# Altium PCB IMX6.PcbDoc
Units mil, origin at the board's own origin, x right, y up, seen from the top; angles counter-clockwise.
Board outline 7950 x 5550 mil, 2 copper layers (Top Layer, Bottom Layer), stack 12.8 mil thick; 109 components, 196 nets, 547 pads, 29 vias.
Unrouted connection lines stored in the file: 264.
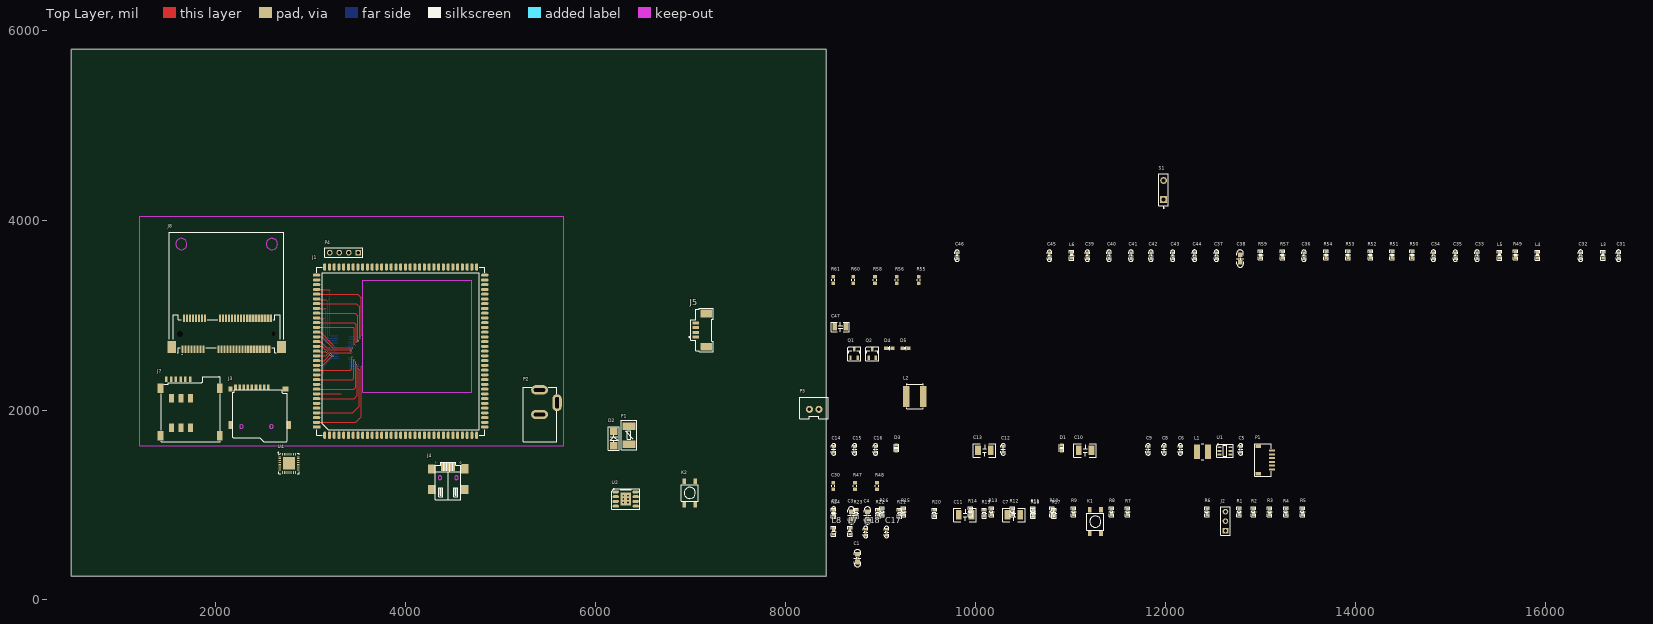
[diagram p0: Top Layer view]
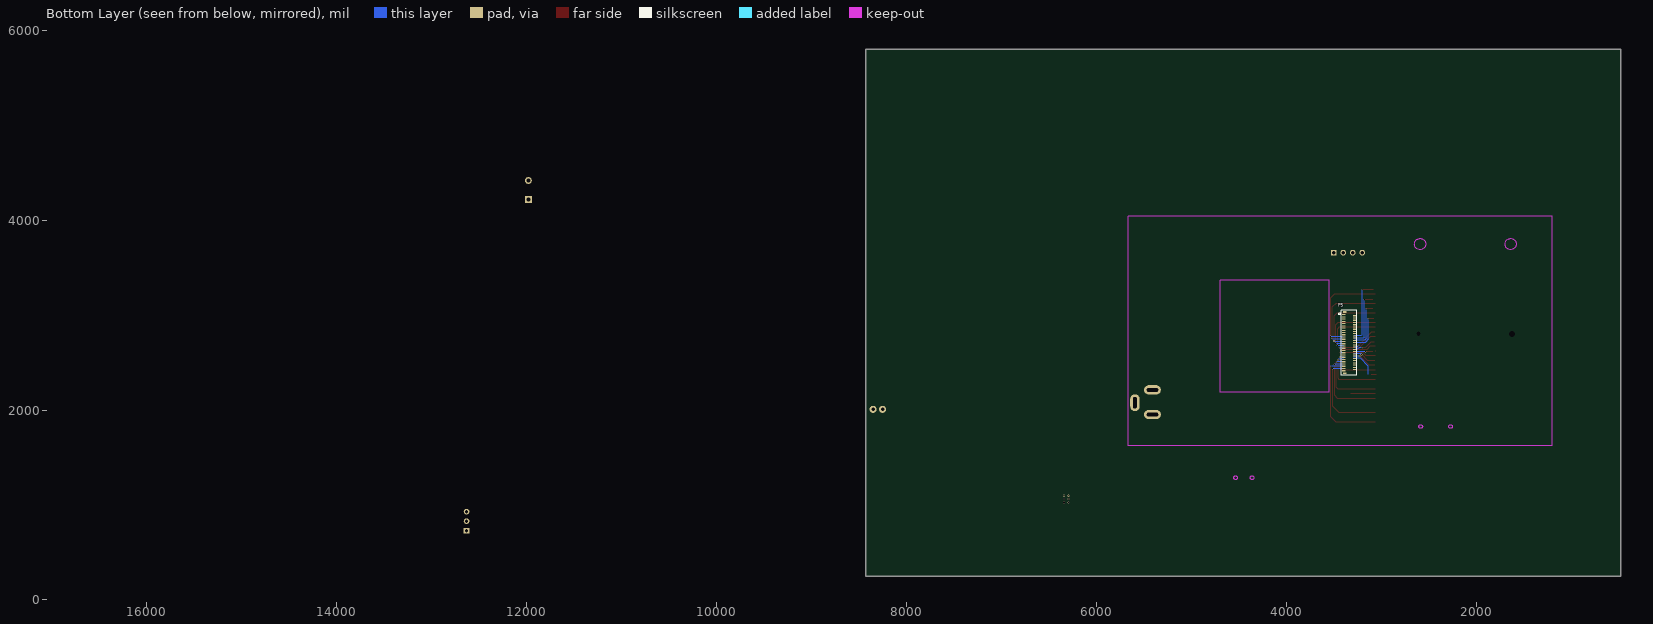
[diagram p1: Bottom Layer view, seen from below]

## Layer stack, top to bottom
Top Layer: signal copper 1.4
Dielectric: core 10, FR-4, Dk 4.2
Bottom Layer: signal copper 1.4

## Board outline
475,5800 8425,5800 8425,250 475,250

## Design rules (kind name [scope] priority, off if disabled: settings)
Clearance [All] p1 off: gap=15
ComponentClearance [All] p1 off: gap=0 collisioncheckmode=3 verticalgap=0
DiffPairsRouting [All] p1: maxlimit=10 minlimit=8 mostfreqgap=8 maxuncoupledlength=500
HoleSize [All] p1: absolutevalues=TRUE maxlimit=300 minlimit=1 maxpercent=80.000 minpercent=20.000
PlaneConnect [All] p1: planeconnectstyle=Direct reliefexpansion=20 reliefentries=4 reliefconductorwidth=12 reliefairgap=10
PolygonConnect [All] p1: connectstyle=Direct reliefconductorwidth=15 reliefentries=4 polygonreliefangle="90 Angle"
RoutingVias [All] p1: holewidth=12 width=20 viastyle="Through Hole" minholewidth=8 minwidth=16 maxholewidth=200 maxwidth=300
SolderMaskExpansion [All] p1: expansion=4
TestPointUsage FabricationTestPointUsage [All] p1: valid=0 allowmultiple=FALSE
Testpoint FabricationTestpoint [(IsPad And (OnTopLayer Or OnBottomLayer))] p1: side=3 testpointundercomponent=TRUE minsize=40 maxsize=100 preferedsize=60 minholesize=0 maxholesize=40 preferedholesize=32 testpointgrid=1 style=297 order=0123456789
Width [All] p1: maxlimit=200 minlimit=6 preferedwidth=10 minimp=50.000000 maximp=50.000000 favimp=50.000000
15 further rules are at their usual default settings.

## Classes and differential pairs
component class 9.RGB&TOUCH: C17 C18 C31 C32 C33 C34 C35 C36 C37 C38 C39 C40 C41 C42 C43 C44 C45 C46 C47 J5 J7 J8 L3 L4 L5 L6 L7 L8 P5 R49 R50 R51 R52 R53 R54 R55 R56 R57 R58 R59 R60 R61 U4
component class 0.CONNECTOR: C1 C2 C3 C4 J1 J2 J3 J4 K1 K2 R1 R2 R3 R4 R5 R6 R7 R8 R9 R10 R11 R12 R13 R14 R15 R16
component class 1.POWER: C5 C6 C7 C8 C9 C10 C11 C12 C13 C14 C15 C16 D1 D2 D3 F1 L1 L2 P1 P2 P3 R17 R18 R19 R20 R21 R22 R23 R24 S1 U1 U2
component class 2.ETH: C30 D4 D5 P4 Q1 Q2 R47 R48
differential pair USB_OTG: +USB_OTG_P -USB_OTG_N

## Components (designator, comment, footprint, x,y, rotation, side; value= is the part's Value field where it differs from the comment)
C1 "22uF" 0805C 8755,440 r0 top
C2 "0.1uF" 0603C 8505,920 r0 top
C3 "22uF" 0805C 8690,890 r0 top
C4 "22uF" 0805C 8860,890 r0 top
C5 "0.1uF" 0603C 12790,1585 r0 top
C6 "0.1uF" 0603C 12155,1585 r0 top
C7 "220uF" 1210C 10470,895 r0 top
C8 "10uF" 0603C 11985,1585 r0 top
C9 "0.1uF" 0603C 11815,1585 r0 top
C10 "220uF" 1210C 11220,1575 r0 top
C11 "220uF" 1210C 9955,895 r0 top
C12 "Cap" 0603C 10290,1585 r0 top
C13 "220uF" 1210C 10160,1575 r0 top
C14 "Cap" 0603C 8505,1585 r0 top
C15 "Cap" 0603C 8725,1585 r0 top
C16 "Cap" 0603C 8945,1585 r0 top
C17 "470pF" 0603C 9061,715 r0 top
C18 "470pF" 0603C 8841,715 r0 top
C30 "104" 0603 8500,1200 r90 top
C31 "0.1uF" 0603C 16770,3625 r0 top
C32 "0.1uF" 0603C 16370,3625 r0 top
C33 "0.1uF" 0603C 15280,3625 r0 top
C34 "470pF" 0603C 14820,3625 r0 top
C35 "470pF" 0603C 15050,3625 r0 top
C36 "0.1uF" 0603C 13455,3625 r0 top
C37 "0.1uF" 0603C 12535,3625 r0 top
C38 "10uF" 0805C 12785,3595 r0 top
C39 "1uF" 0603C 11175,3625 r0 top
C40 "1uF" 0603C 11405,3625 r0 top
C41 "1uF" 0603C 11635,3625 r0 top
C42 "1uF" 0603C 11845,3625 r0 top
C43 "1uF" 0603C 12075,3625 r0 top
C44 "1uF" 0603C 12305,3625 r0 top
C45 "0.1uF" 0603C 10775,3625 r0 top
C46 "0.1uF" 0603C 9805,3625 r0 top
C47 "47uF" 1206C 8515,2875 r0 top
D1 "发光二极管" 0603D 10905,1600 r0 top
D2 "SS54" SMA 6190,1700 r90 top
D3 "发光二极管" 0603D 9165,1600 r0 top
D4 "WORK" 0603-LED 9090,2650 r0 top
D5 "LINK" 0603-LED 9260,2650 r0 top
F1 "Fuse Thermal" 1812F 6350,1640 r90 top
J1 "QFN132" QFN132 3944.83,2620 r90 top
J2 "DEBUG" HDR1X3 12630,730 r90 top
J3 "TF-CAD" TF-CARD 2494,2168 r90 top
J4 "USB_AB" "MINI USB B" 4444.99,1401 r0 top
J5 "SPEAK" 1.25-4P 7051.76,2872.39 r0 top
J7 "MircoSIM" "Micro SIM" 1533,1814 r0 top
J8 "Mini PCI Express" MINI-PCIE-SHORT 2112.87,2802.58 r0 top
K1 "按键" SS-SPB-4.5 11260,825 r90 top
K2 "按键" SS-SPB-4.5 6989,1127 r90 top
L1 "3.3uH" L4030 12390,1560 r0 top
L2 "Inductor" L-6045 9268.76,2143 r0 top
L3 "电感" 0603L 16605,3630 r0 top
L4 "电感" 0603L 15915,3630 r0 top
L5 "电感" 0603L 15515,3630 r0 top
L6 "电感" 0603L 11010,3630 r0 top
L7 "电感" 0603L 8676,722 r0 top
L8 "电感" 0603L 8506,722 r0 top
P1 "DLP-PW" SH1.0-6P 13120,1375 r90 top
P2 "Change" DC-005 5407,1957 r90 top
P3 "BAT" XH2.54-2P 8249,2007 r0 top
P4 "CSB" HDR1X4 3498,3657 r180 top
P5 "FPC-51PIN" FH26-51S-0.3SHW 3393.03,3004.6 r90 bottom
Q1 "NPN" SOT-23-NPN 8720,2595 r0 top
Q2 "NPN" SOT-23-NPN 8910,2595 r0 top
R1 "10K" 0603R 12775,930 r0 top
R2 "10K" 0603R 12925,930 r0 top
R3 "10K" 0603R 13095,930 r0 top
R4 "10K" 0603R 13265,930 r0 top
R5 "10K" 0603R 13440,930 r0 top
R6 "510R" 0603R 12435,930 r0 top
R7 "22R" 0603R 11600,930 r0 top
R8 "22R" 0603R 11430,930 r0 top
R9 "22R" 0603R 11030,930 r0 top
R10 "22R" 0603R 10805,930 r0 top
R11 "10K" 0603R 10605,930 r0 top
R12 "22R" 0603R 10385,930 r0 top
R13 "22R" 0603R 10165,930 r0 top
R14 "510R" 0603R 9945,930 r0 top
R15 "0R" 0603R 9240,930 r0 top
R16 "0R" 0603R 9015,930 r0 top
R17 "10K" 0603R 10825,915 r0 top
R18 "33K" 0603R 10605,915 r0 top
R19 "10K" 0603R 10090,915 r0 top
R20 "Res1" 0603R 9565,915 r0 top
R21 "1K" 0603R 9200,915 r0 top
R22 "Res Semi" 0603R 8970,915 r0 top
R23 "Res Semi" 0603R 8740,915 r0 top
R24 "Res Semi" 0603R 8505,915 r0 top
R47 "Res1" 0603 8730,1200 r90 top
R48 "Res1" 0603 8960,1200 r90 top
R49 "0R" 0603R 15685,3635 r0 top
R50 "33R" 0603R 14595,3635 r0 top
R51 "33R" 0603R 14385,3635 r0 top
R52 "33R" 0603R 14155,3635 r0 top
R53 "33R" 0603R 13920,3635 r0 top
R54 "33R" 0603R 13690,3635 r0 top
R55 "47R" 0603 9400,3370 r90 top
R56 "47R" 0603 9170,3370 r90 top
R57 "4.7K" 0603R 13230,3635 r0 top
R58 "47R" 0603 8940,3370 r90 top
R59 "4.7K" 0603R 13000,3635 r0 top
R60 "47R" 0603 8710,3370 r90 top
R61 "100K" 0603 8500,3370 r90 top
S1 "SW-PB" SPST-2 11979,4317 r90 top
U1 "TPS562201" SOT23-6-DC 12625,1570 r0 top
U2 "TPS54331" SOP8-POW 6314.42,1062 r0 top
U4 "WM8960" QFN-32 2768.54,1438.16 r0 top

## Footprints (in the part's own frame and the unit in brackets; to place one, negate y for a bottom-side part, rotate by r counter-clockwise, add the part's x,y. Pads: shape width x height; smd on the part's side, far side on the other; paste and mask are expansions set on the pad)
1.25-4P [mil]
  rect 71x32 smd: 1(0,-103.43) 2(0,-54.21) 3(0,-5) 4(0,44.21)
  rect 118x83 smd: 5(110.24,-205.79) 6(110.24,144.61)
  silkscreen extent -68,-261 185,200
0603 [mm]
  rect 1x1 smd: 1(-0.864,0) 2(0.864,0)
  silkscreen extent -0.18,-0.43 0.18,0.43
0603-LED [mm]
  rect 1x1 smd: 1(-0.864,0) 2(0.864,0)
  silkscreen extent -0.18,-0.51 0.18,0.56
0603C [mil]
  rect 31.5x30 smd: 1(0,30) 2(0,-30)
  silkscreen extent -24,-60 24,60
0603D [mil]
  rect 35.43x30 smd: A(0,-30) K(0,30)
  silkscreen extent -24,-40 24,39
0603L [mil]
  rect 31.5x30 smd: 1(-0.91,-29.91) 2(-0.91,30.09)
  silkscreen extent -28,-54 27,54
0603R [mil]
  rect 31.5x30 smd: 1(0,30) 2(0,-30)
  silkscreen extent -28,-53 28,53
0805C [mil]
  rect 50x50 smd: 1(0,40) 2(0,-40)
  silkscreen extent -39,-91 35,91
1206C [mm]
  rect 1.2x2 smd: 1(0,0) 2(3,0)
  silkscreen extent -0.9,-1.3 3.9,1.3
1210C [mil]
  rect 60x100 smd: 1(0,0) 2(-135,0)
  silkscreen extent -185,-70 50,70
1812F [mm]
  rect 2x3.4 smd: 1(0,0) 2(4.85,0)
  silkscreen extent -1.5,-2.03 6.35,2.03
DC-005 [mm]
  oval 2.5x4.5 hole 1 slot 3 at 90 deg: 1(6.477,0) 2(-0.127,0)
  oval 4.5x2.5 hole 1 slot 3 at 0 deg: 3(3.048,-4.699)
  silkscreen extent -7.37,-4.63 7.23,4.37
FH26-51S-0.3SHW [mm]
  rect 0.45x1 smd: 0(-15.7,-0.3) 0(0.7,-0.3)
  rect 0.3x0.95 smd: 1(0,0.05) 2(-0.3,-2.91) 3(-0.6,0.05) 4(-0.9,-2.91) 5(-1.2,0.05) 6(-1.5,-2.91) 7(-1.8,0.05) 8(-2.1,-2.91) 9(-2.4,0.05) 10(-2.7,-2.91) 11(-3,0.05) 12(-3.3,-2.91) 13(-3.6,0.05) 14(-3.9,-2.91) 15(-4.2,0.05) 16(-4.5,-2.91) 17(-4.8,0.05) 18(-5.1,-2.91) 19(-5.4,0.05) 20(-5.7,-2.91) 21(-6,0.05) 22(-6.3,-2.91) 23(-6.6,0.05) 24(-6.9,-2.91) 25(-7.2,0.05) 26(-7.5,-2.91) 27(-7.8,0.05) 28(-8.1,-2.91) 29(-8.4,0.05) 30(-8.7,-2.91) 31(-9,0.05) 32(-9.3,-2.91) 33(-9.6,0.05) 34(-9.9,-2.91) 35(-10.2,0.05) 36(-10.5,-2.91) 37(-10.8,0.05) 38(-11.1,-2.91) 39(-11.4,0.05) 40(-11.7,-2.91) 41(-12,0.05) 42(-12.3,-2.91) 43(-12.6,0.05) 44(-12.9,-2.91) 45(-13.2,0.05) 46(-13.5,-2.91) 47(-13.8,0.05) 48(-14.1,-2.91) 49(-14.4,0.05) 50(-14.7,-2.91) 51(-15,0.05)
  silkscreen extent -16.2,-3.5 1.1,1.38
HDR1X3 [mm] "Connector; Header; 3 Position"
  rect 1.5x1.5 hole 0.9: 1(0,0)
  round 1.5 hole 0.9: 2(2.54,0) 3(5.08,0)
  silkscreen extent -1.27,-1.27 6.35,1.27
HDR1X4 [mm] "Connector; Header; 4 Position"
  rect 1.5x1.5 hole 0.9: 1(0,0)
  round 1.5 hole 0.9: 2(2.54,0) 3(5.08,0) 4(7.62,0)
  silkscreen extent -1.27,-1.27 8.89,1.27
L4030 [mm]
  rect 1.6x3.9 smd: 1(-1.45,0) 2(1.45,0)
  silkscreen extent -0.35,-2.1 0.35,2.1
L-6045 [mm]
  rect 1.7x5.7 smd: 1(0,0) 2(4.5,0)
  silkscreen extent 0,-3.3 4.57,3.3
"Micro SIM" [mm]
  rect 1.55x2.6 smd: 0(-2.95,-2.15) 0(-2.95,10.53) 0(12.85,-2.15) 0(12.85,10.53)
  rect 1.4x2.3 smd: 0(0,0) 0(0,7.92) 0(2.54,0) 0(2.54,7.92) 0(5.08,0) 0(5.08,7.92)
  rect 0.7x1.35 smd: 1(-0.12,12.955) 2(2.42,12.955) 3(4.96,12.955) 5(-1.39,12.955) 6(1.15,12.955) 7(3.69,12.955)
  silkscreen extent -2.82,-3.82 13.05,13.58
"MINI USB B" [mm]
  rect 0.5x2.3 smd: 1(-1.6,0) 2(-0.8,0) 3(0,0) 4(0.8,0) 5(1.6,0)
  rect 2x2.5 smd: 6(4.45,-6.038) 7(4.45,-0.538) 8(-4.45,-0.554) 9(-4.45,-6.038)
  Keep-Out Layer circle w0.1: c-2.2,-2.893 r0.5
  Keep-Out Layer circle w0.1: c2.2,-2.893 r0.5
  silkscreen extent -3.4,-8.74 3.4,1.22, body extent -5.32,-8.77 5.38,0.43, height 3.95
MINI-PCIE-SHORT [mm]
  rect 0.6x2 smd: 1(-11.8,-4.1) 2(-11.4,4.1) 3(-11,-4.1) 4(-10.6,4.1) 5(-10.2,-4.1) 6(-9.8,4.1) 7(-9.4,-4.1) 8(-9,4.1) 9(-8.6,-4.1) 10(-8.2,4.1) 11(-7.8,-4.1) 12(-7.4,4.1) 13(-7,-4.1) 14(-6.6,4.1) 15(-6.2,-4.1) 16(-5.8,4.1) 17(-2.2,-4.1) 18(-1.8,4.1) 19(-1.4,-4.1) 20(-1,4.1) 21(-0.6,-4.1) 22(-0.2,4.1) 23(0.2,-4.1) 24(0.6,4.1) 25(1,-4.1) 26(1.4,4.1) 27(1.8,-4.1) 28(2.2,4.1) 29(2.6,-4.1) 30(3,4.1) 31(3.4,-4.1) 32(3.8,4.1) 33(4.2,-4.1) 34(4.6,4.1) 35(5,-4.1) 36(5.4,4.1) 37(5.8,-4.1) 38(6.2,4.1) 39(6.6,-4.1) 40(7,4.1) 41(7.4,-4.1) 42(7.8,4.1) 43(8.2,-4.1) 44(8.6,4.1) 45(9,-4.1) 46(9.4,4.1) 47(9.8,-4.1) 48(10.2,4.1) 49(10.6,-4.1) 50(11,4.1) 51(11.4,-4.1) 52(11.8,4.1)
  rect 2.3x3.2 smd: 53(-14.65,-3.5) 54(14.65,-3.5)
  rrect70% 0x0 hole 1.6: 55(-12.5,0)
  rrect70% 0x0 hole 1.1: 56(12.5,0)
  Keep-Out Layer circle w0.203: c12.1,24 r1.5
  Keep-Out Layer circle w0.203: c-12.132,24.003 r1.5
  silkscreen extent -15.3,-5.1 15.3,27.2
QFN132 [mm]
  rect 0.82x2 smd: 1(-20.32,22.5)
  oval 0.82x2 smd: 2(-19.05,22.5) 3(-17.78,22.5) 4(-16.51,22.5) 5(-15.24,22.5) 6(-13.97,22.5) 7(-12.7,22.5) 8(-11.43,22.5) 9(-10.16,22.5) 10(-8.89,22.5) 11(-7.62,22.5) 12(-6.35,22.5) 13(-5.08,22.5) 14(-3.81,22.5) 15(-2.54,22.5) 16(-1.27,22.5) 17(0,22.5) 18(1.27,22.5) 19(2.54,22.5) 20(3.81,22.5) 21(5.08,22.5) 22(6.35,22.5) 23(7.62,22.5) 24(8.89,22.5) 25(10.16,22.5) 26(11.43,22.5) 27(12.7,22.5) 28(13.97,22.5) 29(15.24,22.5) 30(16.51,22.5) 31(17.78,22.5) 32(19.05,22.5) 33(20.32,22.5) 67(20.32,-22.5) 68(19.05,-22.5) 69(17.78,-22.5) 70(16.51,-22.5) 71(15.24,-22.5) 72(13.97,-22.5) 73(12.7,-22.5) 74(11.43,-22.5) 75(10.16,-22.5) 76(8.89,-22.5) 77(7.62,-22.5) 78(6.35,-22.5) 79(5.08,-22.5) 80(3.81,-22.5) 81(2.54,-22.5) 82(1.27,-22.5) 83(0,-22.5) 84(-1.27,-22.5) 85(-2.54,-22.5) 86(-3.81,-22.5) 87(-5.08,-22.5) 88(-6.35,-22.5) 89(-7.62,-22.5) 90(-8.89,-22.5) 91(-10.16,-22.5) 92(-11.43,-22.5) 93(-12.7,-22.5) 94(-13.97,-22.5) 95(-15.24,-22.5) 96(-16.51,-22.5) 97(-17.78,-22.5) 98(-19.05,-22.5) 99(-20.32,-22.5)
  oval 2x0.82 smd: 34(22.5,20.32) 35(22.5,19.05) 36(22.5,17.78) 37(22.5,16.51) 38(22.5,15.24) 39(22.5,13.97) 40(22.5,12.7) 41(22.5,11.43) 42(22.5,10.16) 43(22.5,8.89) 44(22.5,7.62) 45(22.5,6.35) 46(22.5,5.08) 47(22.5,3.81) 48(22.5,2.54) 49(22.5,1.27) 50(22.5,0) 51(22.5,-1.27) 52(22.5,-2.54) 53(22.5,-3.81) 54(22.5,-5.08) 55(22.5,-6.35) 56(22.5,-7.62) 57(22.5,-8.89) 58(22.5,-10.16) 59(22.5,-11.43) 60(22.5,-12.7) 61(22.5,-13.97) 62(22.5,-15.24) 63(22.5,-16.51) 64(22.5,-17.78) 65(22.5,-19.05) 66(22.5,-20.32) 100(-22.5,-20.32) 101(-22.5,-19.05) 102(-22.5,-17.78) 103(-22.5,-16.51) 104(-22.5,-15.24) 105(-22.5,-13.97) 106(-22.5,-12.7) 107(-22.5,-11.43) 108(-22.5,-10.16) 109(-22.5,-8.89) 110(-22.5,-7.62) 111(-22.5,-6.35) 112(-22.5,-5.08) 113(-22.5,-3.81) 114(-22.5,-2.54) 115(-22.5,-1.27) 116(-22.5,0) 117(-22.5,1.27) 118(-22.5,2.54) 119(-22.5,3.81) 120(-22.5,5.08) 121(-22.5,6.35) 122(-22.5,7.62) 123(-22.5,8.89) 124(-22.5,10.16) 125(-22.5,11.43) 126(-22.5,12.7) 127(-22.5,13.97) 128(-22.5,15.24) 129(-22.5,16.51) 130(-22.5,17.78) 131(-22.5,19.05) 132(-22.5,20.32)
  silkscreen extent -22.5,-22.5 22.5,22.5
QFN-32 [mm]
  rect 0.7x0.25 smd: 1(-2.45,1.75) 2(-2.45,1.25) 3(-2.45,0.75) 4(-2.45,0.25) 5(-2.45,-0.25) 6(-2.45,-0.75) 7(-2.45,-1.25) 8(-2.45,-1.75) 17(2.45,-1.75) 18(2.45,-1.25) 19(2.45,-0.75) 20(2.45,-0.25) 21(2.45,0.25) 22(2.45,0.75) 23(2.45,1.25) 24(2.45,1.75)
  rect 0.25x0.7 smd: 9(-1.75,-2.45) 10(-1.25,-2.45) 11(-0.75,-2.45) 12(-0.25,-2.45) 13(0.25,-2.45) 14(0.75,-2.45) 15(1.25,-2.45) 16(1.75,-2.45) 25(1.75,2.45) 26(1.25,2.45) 27(0.75,2.45) 28(0.25,2.45) 29(-0.25,2.45) 30(-0.75,2.45) 31(-1.25,2.45) 32(-1.75,2.45)
  rect 3.3x3.3 smd: 33(0,0)
  silkscreen extent -2.95,-2.75 2.75,2.95
SH1.0-6P [mm]
  rect 1x1.5 smd: 0(-1.175,3.63) 0(6.175,3.63)
  rect 0.55x1.55 smd: 1(0,0) 2(1,0) 3(2,0) 4(3,0) 5(4,0) 6(5,0)
  silkscreen extent -1.88,0.25 6.88,4.57
SMA [mm]
  rect 2x2 smd: A(-2,0) K(2,0)
  silkscreen extent -3.2,-1.5 3.2,1.5
SOP8-POW [mm]
  oval 1.7x0.8 smd: 1(-2.675,1.905) 2(-2.675,0.635) 3(-2.675,-0.635) 4(-2.675,-1.905) 5(2.675,-1.905) 6(2.675,-0.635) 7(2.675,0.635) 8(2.675,1.905)
  rect 2.8x3.4 smd: 9(0,0)
  silkscreen extent -3.78,-2.7 3.77,2.82
SOT23-6-DC [mm]
  rect 1.1x0.5 smd: 1(-1.45,0.95) 2(-1.45,0) 3(-1.45,-0.95) 4(1.45,-0.95) 5(1.45,0) 6(1.45,0.95)
  silkscreen extent -2.25,-1.75 2.25,1.88, body extent -0.87,-1.5 0.87,1.5, height 1.1
SOT-23-NPN [mm]
  rect 0.6x1.143 smd: 1(0.95,-1.108) 2(-0.95,-1.108) 3(0,1.108)
  silkscreen extent -1.75,-1.89 1.75,1.87, body extent -1.5,-0.66 1.5,0.74, height 1.1
SPST-2 [mm] "Circuit Breaker; 2 Leads"
  rect 1.85x1.85 hole 1.1: 1(-2.54,0)
  round 1.85 hole 1.1: 2(2.54,0)
  silkscreen extent -4.89,-1.27 4.28,1.27
SS-SPB-4.5 [mm]
  rect 1.5x1 smd: 1(-3.15,1.5) 2(3.15,1.5) 3(3.15,-1.5) 4(-3.15,-1.5)
  silkscreen extent -2.25,-2.25 2.25,2.25
TF-CARD [mm]
  rect 1.6x0.7 smd: 1(1.82,-1.466) 2(1.82,-0.366) 3(1.82,0.734) 4(1.82,1.834) 5(1.82,2.934) 6(1.82,4.034) 7(1.82,5.134) 8(1.82,6.234) 9(1.82,7.334)
  rect 1.4x1 smd: 10(1.32,8.634)
  rect 2.2x1.2 smd: 11(-8.28,8.534) 12(-8.28,-6.966)
  rect 1.4x1.6 smd: 13(1.32,-6.066)
  Keep-Out Layer circle w0.203: c-8.68,5.734 r0.5
  Keep-Out Layer circle w0.203: c-8.68,-2.266 r0.5
  silkscreen extent -12.7,-6.37 1.12,8.13
XH2.54-2P [mm]
  round 1.9 hole 0.95 paste+0: 1(0,0)
  round 1.9 hole 0.95: 2(2.54,0)
  silkscreen extent -2.54,-2.54 5.08,3.3

## Part data
C1 C2 C3 C4 C5 C6 C7 C8 C9 C10 C11 C13 C17 C18 C31 C32 C33 C34 C35 C36 C37 C38 C39 C40 C41 C42 C43 C44 C45 C46 C47: library part 电容, "电容"
C12 C14 C15 C16: "Capacitor"
C30: library part CAP
D2: library part SS24
D4 D5: library part LED2, "Typical RED, GREEN, YELLOW, AMBER GaAs LED"
F1: "Thermal Fuse"
J2: library part "Header 3", "Header, 3-Pin"
J4: "小USB插痤"
J5 P4: library part "Header 4", "Header, 4-Pin"
J8: library part MINIPCIE, "MPC24-52K3311"
L1: library part 功率电感
P1: library part "Header 6", "Header, 6-Pin"
P2 P3: library part "Header 2", "Header, 2-Pin"
Q1 Q2: library part 2N5551, "NPN General Purpose Amplifier"
R1 R2 R3 R4 R5 R6 R7 R8 R9 R10 R11 R12 R13 R14 R15 R16 R17 R18 R19 R21 R49 R50 R51 R52 R53 R54 R57 R59: library part 电阻, "电阻"
R20 R47 R48: "Resistor"
R22 R23 R24: "Semiconductor Resistor"
R55 R56 R58 R60 R61: library part Res1, "Resistor"
S1: "Switch"

## Via types
v1: diameter 18, hole 10, Top Layer to Bottom Layer, 22 vias
v2: diameter 22, hole 18, Top Layer to Bottom Layer, 6 vias
v3: diameter 18, hole 11, Top Layer to Bottom Layer, 1 vias

## Nets (pads, with @x,y where several pads share a name; then routed paths per layer and width w, separated by ;. In a path a pad name is that pad's centre, name@x,y a point inside that pad or via, vN(x,y) a via of type N, cw(c..) or ccw(c..) an arc to the next point about the centre after c; other vN are vias at no path point)
+3.3V: C6.1 C7.1 C30.2 C32.1 C46.1 C47.1 J8.2 J8.24 J8.39 J8.41 J8.52 L1.1 L3.1 P4.4 R18.1 R21.2 R47.1 R48.1 R57.1 R59.1 U4.8 U4.10
+12V: C10.2 C11.2 F1.2 P1.1 P1.2 P1.3 U2.2
AUGND: C1.1 C2.1 C3.1 C4.1 C6.2 C7.2 C8.2 C9.2 C10.1 C11.1 C13.1 C14.2 C16.1 C17.2 C18.2 C30.1 C31.2 C32.2 C33.1 C34.2 C35.2 C36.2 C37.2 C38.2 C39.1 C40.1 C41.1 C42.1 C43.1 C44.1 C45.1 C46.2 C47.2 D1.K D2.A D3.K J1.5 J1.6 J1.31 J1.32 J1.33 J1.36 J1.37 J1.54 J1.87 J1.90 J1.111 J1.113 J1.120 J2.3 J3.6 J3.10 J3.11 J3.12 J3.13 J4.5 J4.6 J4.7 J4.8 J4.9 J7.5 J8.4 J8.9 J8.15 J8.18 J8.21 J8.26 J8.27 J8.29 J8.34 J8.35 J8.37 J8.40 J8.43 J8.50 K1.1 K1.2 K2.1 K2.2 L6.1 L6.2 P1.4 P1.5 P1.6 P2.2 P3.2 P4.1 P5.1 P5.2 P5.8 P5.19 P5.28 P5.37 P5.46 P5.51 Q1.1 Q2.1 R19.1 R23.1 R24.1 R61.1 U1.1 U2.7 U2.9 U4.9 U4.20 U4.24 U4.28 U4.33
  other v2: 6289.42,1027 6339.42,1027 6289.42,1062 6339.42,1062 6289.42,1097 6339.42,1097
CLK1_N: J1.83
CLK1_P: J1.82
CSB_CS: P4.3
CSB_SIG: P4.2
CSI_DATA0: J1.121
CSI_DATA1: J1.122
CSI_DATA2: J1.123
CSI_DATA3: J1.124
CSI_DATA4: J1.125
CSI_DATA5: J1.126
CSI_DATA6: J1.127
CSI_DATA7: J1.128
CSI_HSYNC: J1.129 R59.2 U4.17
CSI_MCLK: J1.132
CSI_PIXCLK: J1.131
CSI_VSYNC: J1.130 R57.2 U4.18
DCDC_3V3: C1.2 J1.112 J3.4 R1.2 R2.2 R3.2 R4.2 R5.2 R11.2
DLP_CTL: R60.1 R61.2
ENET1_CRS_DV: J1.43
ENET1_RXD0: J1.45
ENET1_RXD1: J1.44
ENET1_RXER: J1.38
ENET1_TX_CLK: J1.42
ENET1_TXD0: J1.39
ENET1_TXD1: J1.40
ENET1_TXEN: J1.41
ENET2_CRS_DV: J1.49
ENET2_RXD0: J1.51
ENET2_RXD1: J1.50
ENET2_RXER: J1.52
ENET2_TX_CLK: J1.53
ENET2_TXD0: J1.46
ENET2_TXD1: J1.48
ENET2_TXEN: J1.47
GPIO1_0: J1.71
GPIO1_1: J1.72
GPIO1_2: J1.73
GPIO1_3: J1.74
GPIO1_4: J1.75
GPIO1_5: J1.76
GPIO1_6: J1.77
GPIO1_7: J1.78
GPIO1_8: J1.79
GPIO1_9: J1.80
GPIO5_IO0: J1.100
GPIO5_IO1: J1.101
GPIO5_IO2: J1.102
GPIO5_IO3: J1.103
GPIO5_IO4: J1.104
GPIO5_IO5: J1.105
GPIO5_IO6: J1.106
GPIO5_IO7: J1.107
GPIO5_IO8: J1.108
GPIO5_IO9: J1.109
I2C3_SCL: R56.1
I2C3_SDA: R58.1
LCD_DATA0: J1.7 P5.45 | length 855.5
  Top Layer w6: J1.7 3455,2120 3490,2155 v1@3490,2481
  Bottom Layer w6: P5.45@3407,2484 v1@3491,2484
  other v1: 3491,2482
LCD_DATA1: J1.8 P5.44 | length 258
  Top Layer w6: J1.8 3317,2170
LCD_DATA2: J1.9 P5.43 | length 756.1
  Top Layer w6: J1.9 3449,2220 3471,2242 v1@3471,2510
  Bottom Layer w6: P5.43@3405,2509 v1@3472,2509
  other v1: 3473,2509
LCD_DATA3: J1.10 P5.42
LCD_DATA4: J1.11 P5.41 | length 653.8
  Top Layer w6: J1.11 3439,2320 3453,2334 v1(3453,2530)
  Bottom Layer w6: P5.41@3395,2532 v1@3453,2532
LCD_DATA5: J1.12 P5.40 | length 329
  Top Layer w6: J1.12@3052,2370 3105,2370
  Bottom Layer w6: 3134,2377 3134,2462 3216,2544 P5.40@3291,2544
LCD_DATA6: J1.13 P5.39 | length 536.6
  Top Layer w6: J1.13 3418,2420 3432,2434 v1@3432,2554
  Bottom Layer w6: P5.39@3395,2555 v1(3432,2555) v1@3432,2555.78
LCD_DATA7: J1.14 P5.38 | length 263
  Top Layer w6: J1.14@3064,2471 3127,2471 3226,2570 v1@3228,2570
  Bottom Layer w6: v1@3230,2568 P5.38@3288,2568
  other v1: 3226,2569
LCD_DATA8: J1.15 P5.36 | length 251.1
  Top Layer w6: J1.15@3068,2521 3140,2521 v1@3206,2587
  Bottom Layer w6: v1@3206,2583 3215,2592 P5.36@3288,2592
  other v1: 3206,2584
LCD_DATA9: J1.16 P5.35 | length 418.7
  Top Layer w6: J1.16 3156,2570 3189,2603 v1(3430,2603)
  Bottom Layer w6: P5.35@3396,2603 v1(3430,2603)
LCD_DATA10: J1.17 P5.34 | length 182
  Top Layer w6: J1.17@3058,2621 J1.17@3059.02,2620.98 ; J1.17@3085,2616 v1@3165,2616
  Bottom Layer w6: v1@3166,2614.84 P5.34@3267,2614.84
  other v1: 3164,2615
LCD_DATA11: J1.18 P5.33 | length 396.3
  Top Layer w6: J1.18 3117,2670 3151,2636 3414,2636 v1@3421,2629
  Bottom Layer w6: P5.33@3406,2626.65 3423,2626.65 v1(3423,2627)
LCD_DATA12: J1.19 P5.32 | length 232.9
  Top Layer w6: J1.19@3071,2716 3109,2716 3169,2656 v1(3199,2656)
  Bottom Layer w6: v1(3199,2656) 3232,2656 3249,2639 P5.32@3272,2639
LCD_DATA13: J1.20 P5.31 | length 477
  Top Layer w6: J1.20 3115,2770 3229,2656 3440,2656 v1@3441,2655
  Bottom Layer w6: P5.31@3394,2650 3395,2650.01 3419,2650.27 3433.27,2650.27 v1@3439,2656
  other v1: 3441,2656
LCD_DATA14: J1.21 P5.30 | length 270
  Top Layer w6: J1.21@3068,2817 3101,2817 v1@3234,2684
  Bottom Layer w6: v1@3235,2681 3254,2662 P5.30@3276,2662
  other v1: 3235,2683
LCD_DATA15: J1.22 P5.29 | length 647.2
  Top Layer w6: J1.22 3444,2870 3458,2856 v3@3458,2680
  Bottom Layer w6: P5.29 3396.11,2675 3451,2675 v3@3458,2682
  other v3: 3460,2681
LCD_DATA16: J1.23 P5.27 | length 698.7
  Top Layer w6: J1.23 3455,2920 3477,2898 v1(3477,2702)
  Bottom Layer w6: P5.27@3403,2697.51 3404.49,2699 v1@3478,2699
LCD_DATA17: J1.24 P5.26 | length 432.8
  Top Layer w6: J1.24@3078,2959 v1@3136,2959
  Bottom Layer w6: v1(3134,2960) 3134,2744 3168.68,2709.32 P5.26
LCD_DATA18: J1.25 P5.25 | length 813.6
  Top Layer w6: J1.25 3466,3020 3493,2993 v1@3493,2728
  Bottom Layer w6: P5.25 3490.13,2721.13 v1@3496,2727
  other v1: 3495,2726
LCD_DATA19: J1.26 P5.24 | length 512.5
  Top Layer w6: J1.26@3089,3066 v1@3157,3066
  Bottom Layer w6: v1(3156,3065) 3156,2751 3174.05,2732.95 3254,2732.95 3278.42,2733.98 P5.24@3279,2734
LCD_DATA20: J1.27 P5.23 | length 911.1
  Top Layer w6: J1.27 3478,3120 3512,3086 3512,2754 v1@3514,2752
  Bottom Layer w6: P5.23@3408,2744.76 3509.76,2744.76 v1@3515,2750
  other v1: 3513,2749
LCD_DATA21: J1.28 P5.22 | length 589.4
  Top Layer w6: J1.28@3088,3161 v1@3177,3161
  Bottom Layer w6: 3177,2767 v1@3177,3161 ; 3179,2767 3189.43,2756.57 3254,2756.57 3278.4,2757.86 P5.22@3281,2758
  other v1: 3176,3161
LCD_DATA22: J1.29 P5.21 | length 1021.6
  Top Layer w6: J1.29 3495,3220 3531,3184 v1(3531,2776)
  Bottom Layer w6: P5.21@3394,2768 P5.21@3395.01,2768.02 ; P5.21@3409,2768 3410,2769 3523,2769 v1@3531,2777
LCD_DATA23: J1.30 P5.20 | length 679.7
  Top Layer w6: J1.30@3082,3267 v1@3198,3267
  Bottom Layer w6: v1(3198,3266) 3198,2789 3206.81,2780.19 3254,2780.19 3278.46,2780.02 P5.20@3281,2780
LCD_DE: J1.3 P5.50
LCD_HSYNC: J1.2 P5.47 | length 1148
  Top Layer w6: J1.2 3471,1870 3529,1928 v1@3529,2460
  Bottom Layer w6: P5.47@3406,2462 v1@3528,2462
  other v1: 3529,2461
LCD_PCLK: J1.4 P5.49 | length 983.2
  Top Layer w6: J1.4 3442,1970 3510,2038 v1(3510,2436)
  Bottom Layer w6: P5.49@3404,2437 v1@3510,2437
LCD_VDD_EN: J1.99
LCD_VSYNC: J1.1 P5.48
LINK_LED: Q2.2
NetC5_1: C5.1 L1.2 U1.2
NetC5_2: C5.2 U1.6
NetC12_1: C12.1 D2.K L2.1 U2.8
NetC12_2: C12.2 U2.1
NetC14_1: C14.1 U2.4
NetC15_1: C15.1 R24.2
NetC15_2: C15.2 C16.2 U2.6
NetC17_1: C17.1 J5.3 L7.2
NetC18_1: C18.1 J5.4 L8.2
NetC31_1: C31.1 L3.2 U4.32
NetC33_2: C33.2 R49.2 U4.21 U4.26
NetC34_1: C34.1 J5.1 L4.2
NetC35_1: C35.1 J5.2 L5.2
NetC36_1: C36.1 U4.1
NetC37_1: C37.1 C38.1 U4.27
NetC39_2: C39.2 U4.4
NetC40_2: C40.2 U4.5
NetC41_2: C41.2 U4.3
NetC42_2: C42.2 U4.2
NetC43_2: C43.2 U4.6
NetC44_2: C44.2 U4.7
NetD1_A: D1.A R20.2
NetD3_A: D3.A R21.1
NetD4_1: D4.1 R47.2
NetD4_2: D4.2 Q1.3
NetD5_1: D5.1 R48.2
NetD5_2: D5.2 Q2.3
NetF1_1: F1.1 S1.2
NetJ4_2: J4.2 R15.1
NetJ4_3: J4.3 R16.1
NetK1_3: K1.3 K1.4 R6.1
NetK2_3: K2.3 K2.4 R14.1
NetL4_1: L4.1 U4.25
NetL5_1: L5.1 U4.23
NetL7_1: L7.1 U4.22
NetL8_1: L8.1 U4.19
NetP5_5: P5.5 R55.2
NetP5_9: P5.9 R56.2
NetP5_10: P5.10 R58.2
NetP5_15: P5.15 R60.2
NetR17_2: R17.2 U1.5
NetR18_2: R18.2 R19.2 U1.4
NetR22_1: R22.1 R23.2 U2.5
NetR50_2: R50.2 U4.11
NetR51_2: R51.2 U4.12
NetR52_2: R52.2 U4.13
NetR53_2: R53.2 U4.14
NetR54_2: R54.2 U4.16
NUSB_OTG_CHD: J1.93
ONOFF: J1.110 R14.2
POR_B: J1.84
PWRON: J1.81 R6.2
SAI2_BCLK: J1.94 R51.1
SAI2_MCLK: R50.1
SAI2_RX: J1.95
SAI2_RXD: R54.1
SAI2_SYNC: J1.96 R52.1
SAI2_TX: J1.98
SAI2_TXD: R53.1
SD1_CLK: J1.114 R10.1
SD1_CMD: J1.115 R9.1
SD1_DATA0: J1.119 R12.1
SD1_DATA1: J1.118 R13.1
SD1_DATA2: J1.117 R7.1
SD1_DATA3: J1.116 R8.1
SD1_NCD: J3.9 R11.1
SD_CLK: J3.5 R10.2
SD_CMD: J3.3 R3.1 R9.2
SD_DATA0: J3.7 R4.1 R12.2
SD_DATA1: J3.8 R5.1 R13.2
SD_DATA2: J3.1 R1.1 R7.2
SD_DATA3: J3.2 R2.1 R8.2
SPDIF_TX: J1.97
TEMP_STAT: R55.1
UART1_CTS: J1.68
UART1_RTS: J1.67
UART1_RXD: J1.69 J2.1
UART1_TXD: J1.70 J2.2
UART2_CTS: J1.63
UART2_RTS: J1.64
UART2_RXD: J1.65
UART2_TXD: J1.66
UART3_CTS: J1.59
UART3_RTS: J1.60
UART3_RXD: J1.61
UART3_TXD: J1.62
UART4_RXD: J1.57
UART4_TXD: J1.58
UART5_RXD: J1.55
UART5_TXD: J1.56
UIM_CLK: J7.3 J8.12
UIM_DATA: J7.7 J8.10
UIM_PWR: C45.2 J7.1 J8.8
UIM_RESET: J7.2 J8.14
UIM_VPP: J7.6 J8.16
USB_DTG2_N: J1.88
USB_DTG2_P: J1.89
USB_OTG1_VBUS: C2.2 C3.2 C4.2 J1.91 J4.1
USB_OTG2_N: J8.36
USB_OTG2_P: J8.38
USB_OTG2_VBUS: J1.92
USB_OTG_N: J1.85 R15.2
USB_OTG_P: J1.86 R16.2
USBOTG1_ID: J4.4
VCC5V: C8.1 C9.1 C13.2 J1.34 J1.35 L2.2 R17.1 R20.1 R22.2 R49.1 U1.3
VIN: P2.1 P3.1 S1.1
WORK_LED: Q1.2
pads on no net: J5.5 J5.6 J7.0 J8.1 J8.3 J8.5 J8.6 J8.7 J8.11 J8.13 J8.17 J8.19 J8.20 J8.22 J8.23 J8.25 J8.28 J8.30 J8.31 J8.32 J8.33 J8.42 J8.44 J8.45 J8.46 J8.47 J8.48 J8.49 J8.51 J8.53 J8.54 J8.55 J8.56 P1.0 P2.3 P5.0 P5.3 P5.4 P5.6 P5.7 P5.11 P5.12 P5.13 P5.14 P5.16 P5.17 P5.18 U2.3 U4.15 U4.29 U4.30 U4.31

## Keep-outs
Keep-Out Layer:
  lines w10: 1199,1623 1199,4041 5662,4041 5662,1623 1199,1623 ; 3546,2189 3546,3369 4693,3369 4693,2189 3546,2189

## Text inside footprints (layer, text, board x,y; h text height)
J4: Top Overlay "V" at 4324.99,1467 h30 r180; Top Overlay "G" at 4585.99,1467 h30 r180
J8: Top Overlay "1" at 1667.98,2570.3 h40 r90